# Altium PCB AC_Dimmer_Module.pcbdoc
Units mm, origin at the board's own origin, x right, y up, seen from the top; angles counter-clockwise.
Board outline 94.09 x 74.35 mm, 2 copper layers (Top Layer, Bottom Layer); 13 components, 17 nets, 41 pads, 0 vias.
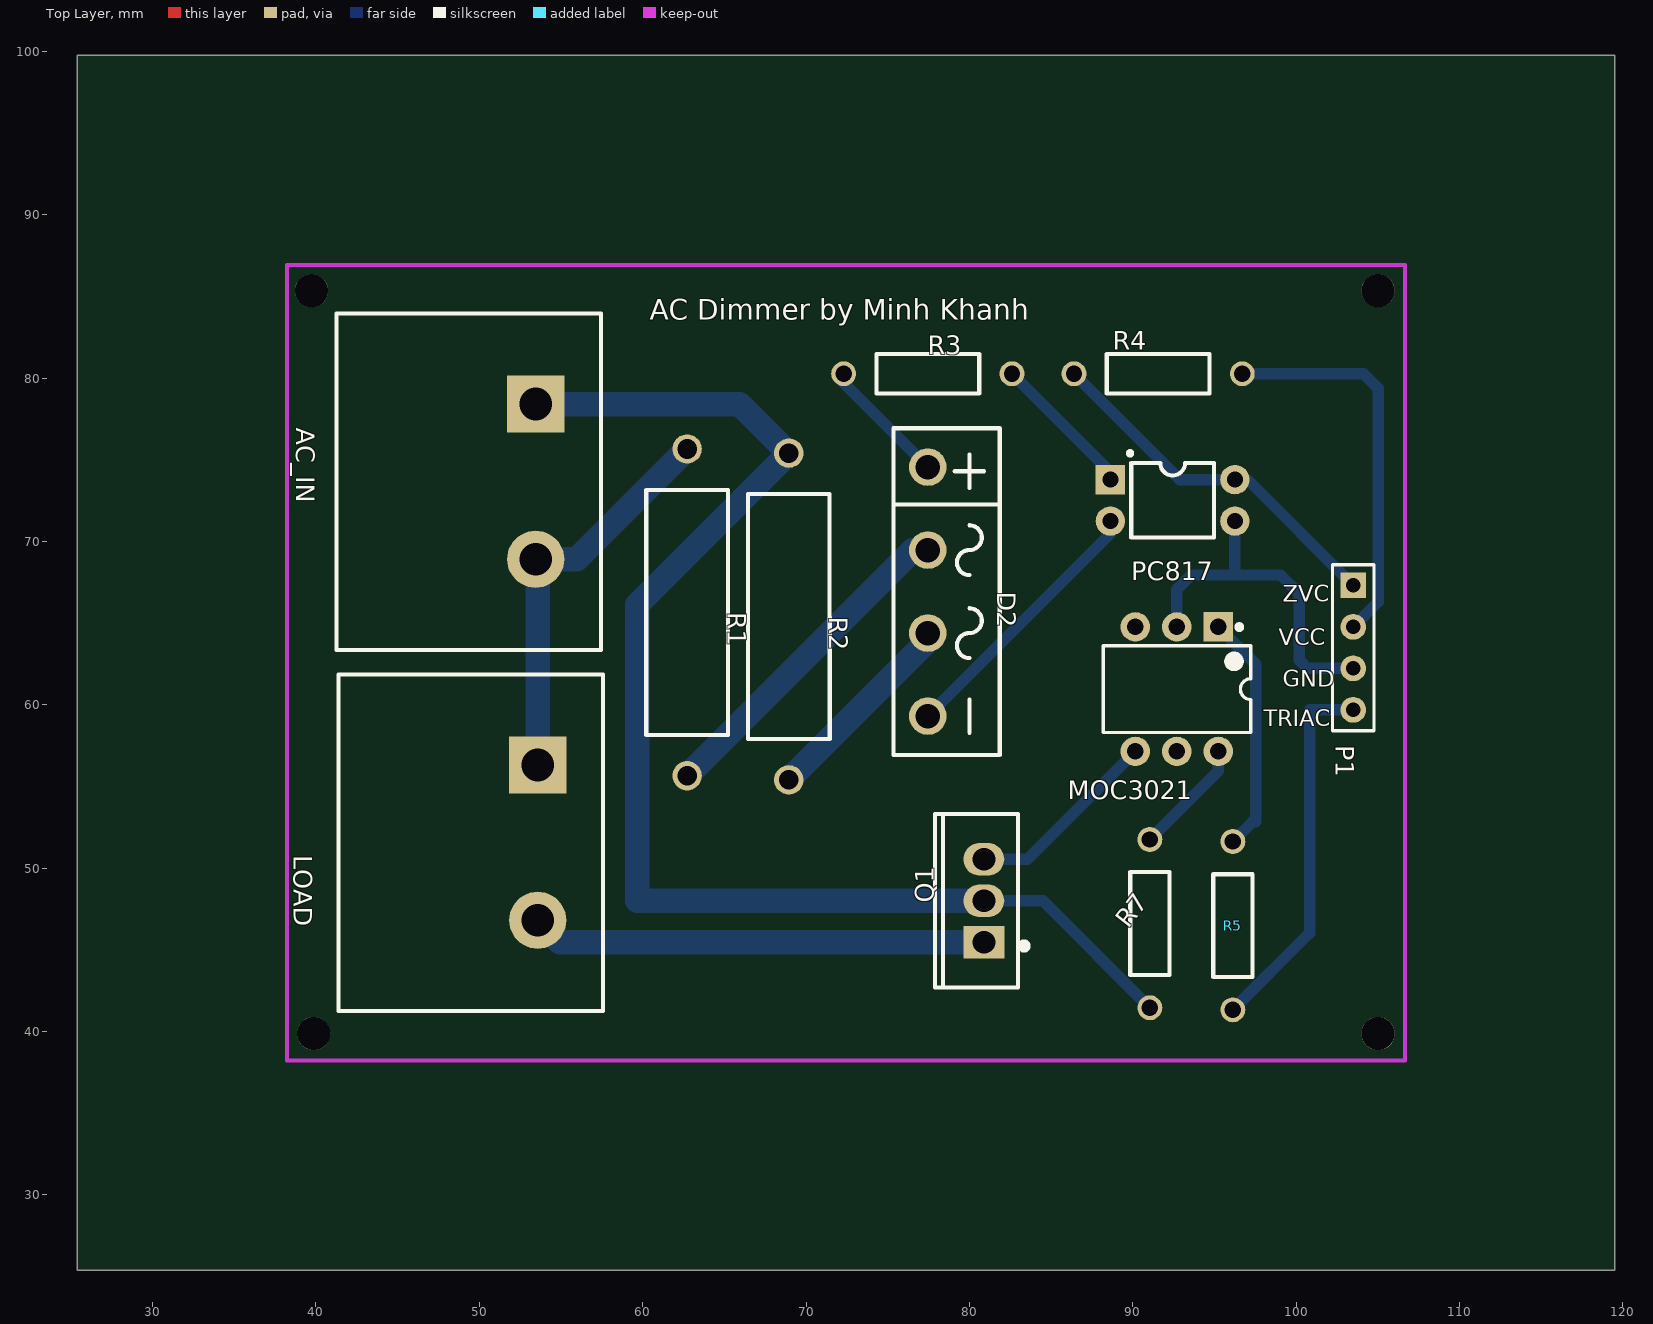
[diagram p0: Top Layer view]
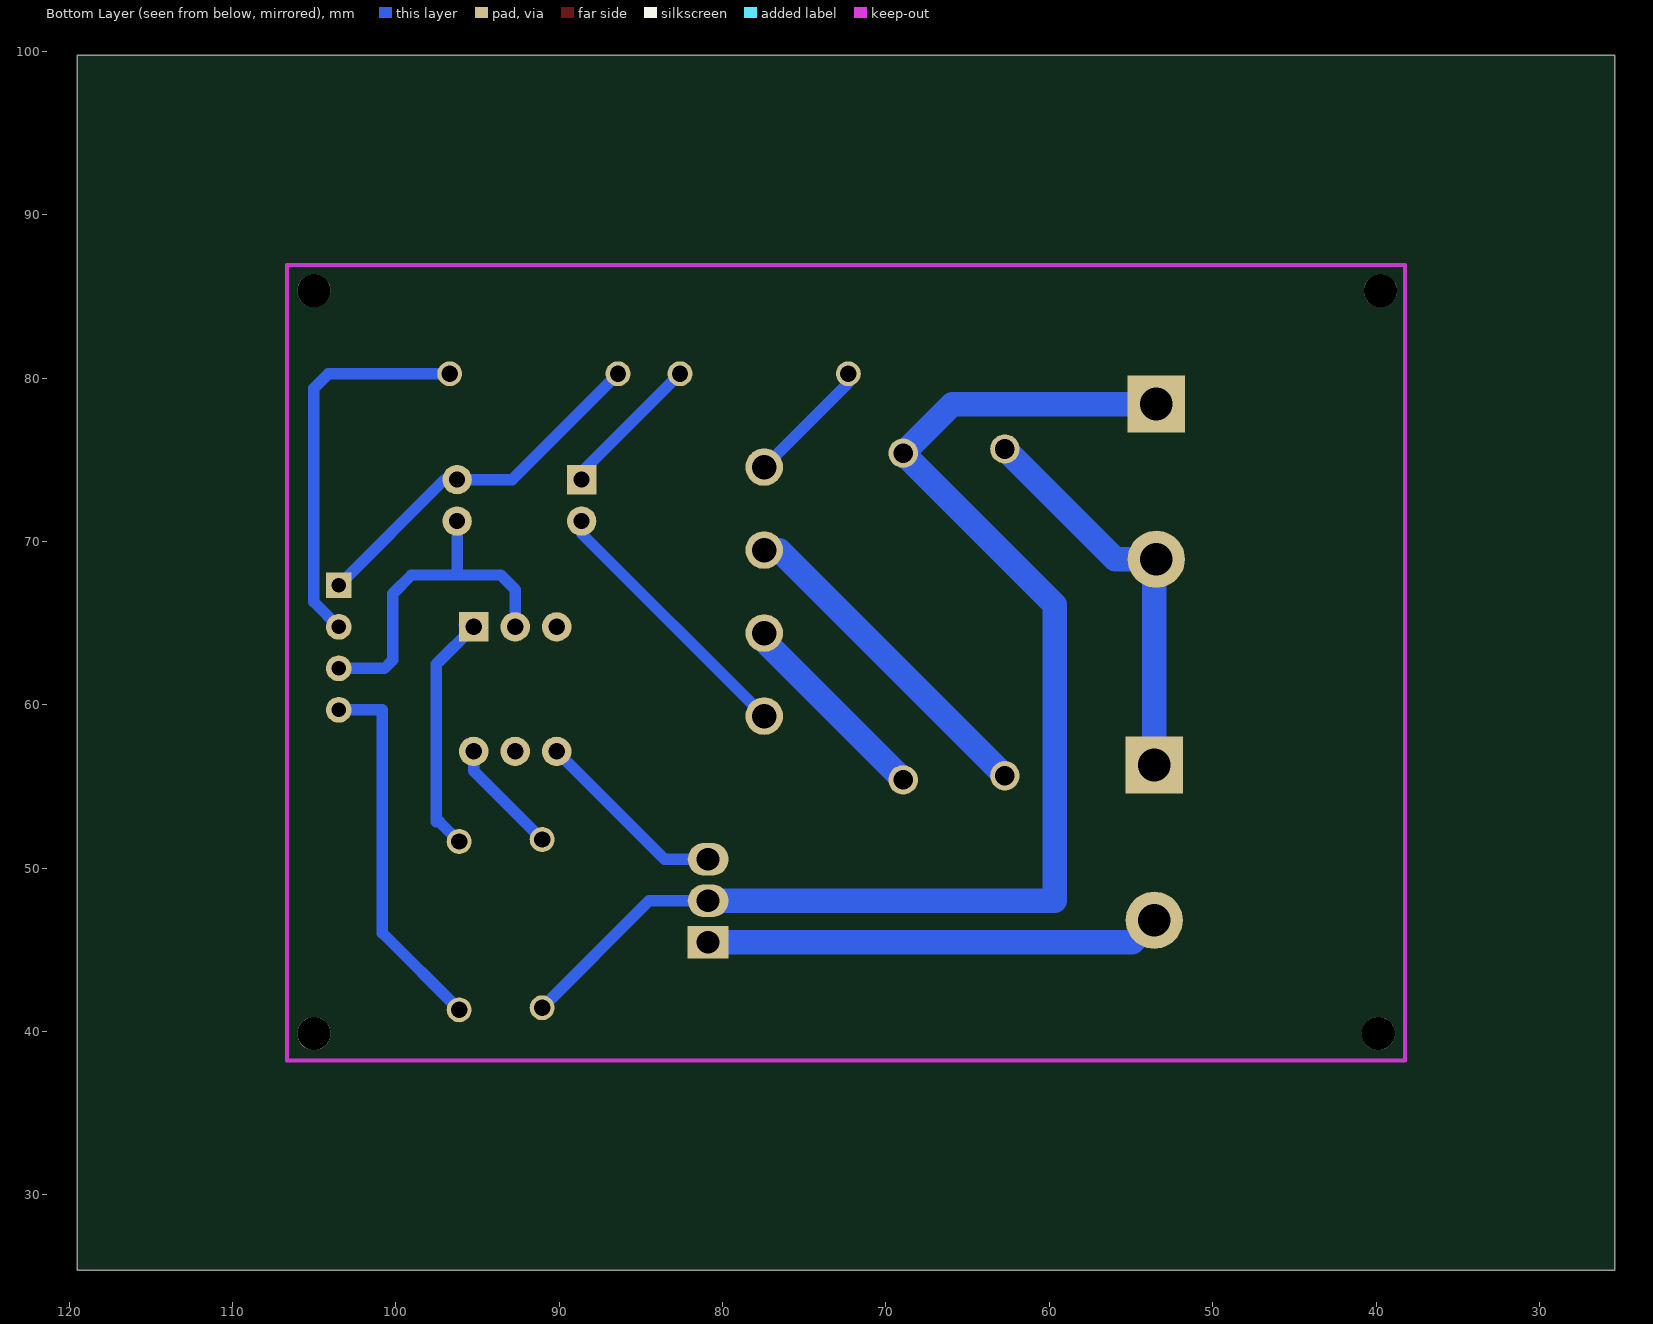
[diagram p1: Bottom Layer view, seen from below]

## Layer stack, top to bottom
Top Layer: signal copper (thickness not stored)
Dielectric: dielectric 0.32, FR-4, Dk 4.8
Bottom Layer: signal copper (thickness not stored)

## Board outline
119.492,25.4 25.4,25.4 25.4,99.751 119.492,99.751

## Components (designator, comment, footprint, x,y, rotation, side; value= is the part's Value field where it differs from the comment)
AC_IN "HB9500-2P" CONN-TH_HB9500SS-9.5-2P 53.452,73.66 r270 top
D2 "KBL410" DIO-BG-TH_RS-4L 77.455,66.929 r270 top
LOAD "HB9500-2P" CONN-TH_HB9500SS-9.5-2P 53.579,51.562 r270 top
MOC3021 "MOC3021" DIP-6_L8.5-W6.4-P2.54-LS7.6-BL 92.695,60.96 r180 top
P1 "Header-Female-2.54_1x4" HDR-4X1/2.54 103.49,63.5 r270 top
PC817 "PC817" DIP-4_L6.4-W4.6-P2.54-LS7.6-BL 92.441,72.517 r270 top
Q1 "BTA20" TO-220F-3_L10.2-W4.9-P2.54-L 80.884,48.006 r90 top
R1 "47K" RES-TH_BD4.5-L11.0-P15.00-D0.8 62.723,65.659 r270 top
R2 "47K" RES-TH_BD4.5-L11.0-P15.00-D0.8 68.946,65.405 r270 top
R3 "1K" RES-TH_BD2.4-L6.3-P10.30-D0.6 77.455,80.264 r0 top
R4 "10K" RES-TH_BD2.4-L6.3-P10.30-D0.6 91.552,80.264 r180 top
R5 "330" RES-TH_BD2.4-L6.3-P10.30-D0.6 96.124,46.482 r270 top
R7 "330" RES-TH_BD2.4-L6.3-P10.30-D0.6 91.044,46.609 r90 top

## Footprints (in the part's own frame and the unit in brackets; to place one, negate y for a bottom-side part, rotate by r counter-clockwise, add the part's x,y. Pads: shape width x height; smd on the part's side, far side on the other; paste and mask are expansions set on the pad)
CONN-TH_HB9500SS-9.5-2P [mm]
  rect 3.5x3.5 hole 2: 1(-4.75,0)
  round 3.5 hole 2: 2(4.75,0)
  silkscreen extent -10.3,-12.2 10.3,4
DIO-BG-TH_RS-4L [mm]
  round 2.3 hole 1.5: 1(-7.62,0) 2(-2.54,0) 3(2.54,0) 4(7.62,0)
  silkscreen extent -10,-2.1 10,4.4
DIP-4_L6.4-W4.6-P2.54-LS7.6-BL [mm]
  rect 1.8x1.8 hole 1: 1(-1.27,-3.81)
  round 1.8 hole 1: 2(1.27,-3.81) 3(1.27,3.81) 4(-1.27,3.81)
  silkscreen extent -3,-2.73 2.29,2.54
DIP-6_L8.5-W6.4-P2.54-LS7.6-BL [mm]
  rect 1.8x1.8 hole 1: 1(-2.54,-3.81)
  round 1.8 hole 1: 2(0,-3.81) 3(2.54,-3.81) 4(2.54,3.81) 5(0,3.81) 6(-2.54,3.81)
  silkscreen extent -4.52,-3.95 4.5,2.65
HDR-4X1/2.54 [mil]
  rect 62x62 hole 35: 1(-150,0)
  round 62 hole 35: 2(-50,0) 3(50,0) 4(150,0)
  silkscreen extent -200,-50 200,50
RES-TH_BD2.4-L6.3-P10.30-D0.6 [mm]
  round 1.524 hole 1: 1(-5.15,0) 2(5.15,0)
  silkscreen extent -3.15,-1.2 3.15,1.2
RES-TH_BD4.5-L11.0-P15.00-D0.8 [mm]
  round 1.8 hole 1.2: 1(-10,0) 2(10,0)
  silkscreen extent -7.5,-2.5 7.5,2.5
TO-220F-3_L10.2-W4.9-P2.54-L [mm]
  rect 2x2.5 hole 1.4: 1(-2.54,0)
  oval 2x2.5 hole 1.4: 2(0,0) 3(2.54,0)
  silkscreen extent -5.3,-2.66 5.3,3

## Free pads (board coordinates)
  round 2.032 hole 2.032 unplated: ""(39.736,85.344) ""(39.863,39.878) ""(105.014,39.878) ""(105.014,85.344)

## Nets (pads, with @x,y where several pads share a name; then routed paths per layer and width w, separated by ;. In a path a pad name is that pad's centre, name@x,y a point inside that pad or via, vN(x,y) a via of type N, cw(c..) or ccw(c..) an arc to the next point about the centre after c; other vN are vias at no path point)
AC_IN_1: AC_IN.1 Q1.2 R2.1 R7.1 | length 82.1
  Bottom Layer w0.7: Q1.2 84.497,48.006 R7.1
  Bottom Layer w1.5: AC_IN.1 65.941,78.41 R2.1 59.675,66.134 59.675,48.006 Q1.2
AC_IN_2: AC_IN.2 LOAD.1 R1.1 | length 24.7
  Bottom Layer w1.5: LOAD.1 53.579,68.783 AC_IN.2 55.974,68.91 R1.1
D2_1: D2.1 R3.1 | length 7.8
  Bottom Layer w0.7: R3.1 72.305,79.699 D2.1
LOAD_2: LOAD.2 Q1.1 | length 27.9
  Bottom Layer w1.5: LOAD.2 54.925,45.466 Q1.1
MOC3021_1: MOC3021.1 R5.1 | length 15.5
  Bottom Layer w0.6: MOC3021.1 95.743,64.77 MOC3021.1@95.87,64.897
  Bottom Layer w0.7: MOC3021.1 97.521,62.484 97.521,52.832 97.324,52.832 R5.1
MOC3021_3: MOC3021.3
MOC3021_4: MOC3021.4 Q1.3 | length 12
  Bottom Layer w0.7: Q1.3 83.551,50.546 MOC3021.4
MOC3021_5: MOC3021.5
MOC3021_6: MOC3021.6 R7.2 | length 7.1
  Bottom Layer w0.7: R7.2 95.235,55.95 MOC3021.6
P1_2: P1.2 R4.1 | length 23.9
  Bottom Layer w0.7: R4.1 104.125,80.264 105.014,79.375 105.014,66.294 P1.2
P1_4: P1.4 R5.2 | length 23
  Bottom Layer w0.7: R5.2 100.823,46.031 100.823,59.69 P1.4
PC817_1: PC817.1 R3.2 | length 9
  Bottom Layer w0.7: R3.2 88.631,74.238 PC817.1
PC817_2: D2.4 PC817.2 | length 16.6
  Bottom Layer w0.7: D2.4 88.631,70.485 PC817.2
PC817_3: MOC3021.2 P1.3 PC817.3 | length 24.8
  Bottom Layer w0.7: MOC3021.2 92.695,67.056 93.584,67.945 96.251,67.945 ; P1.3 100.696,62.23 100.188,62.738 100.188,66.802 99.045,67.945 96.251,67.945 ; 96.251,67.945 PC817.3 96.251,67.945
PC817_4: P1.1 PC817.4 R4.2 | length 22.5
  Bottom Layer w0.7: R4.2 92.879,73.787 PC817.4 97.013,73.787 P1.1
R1_2: D2.2 R1.2 | length 20.5
  Bottom Layer w1.5: R1.2 76.533,69.469 D2.2
R2_2: D2.3 R2.2 | length 12.5
  Bottom Layer w1.5: R2.2 77.455,63.914 D2.3

## Silkscreen, mask and mechanical layers (free items; w line width, h text height)
Top Overlay:
  text "AC Dimmer by Minh Khanh" at 60.437,83.576 h1.25
  text "ZVC" at 99.172,66.302 h1
  text "VCC" at 98.918,63.635 h1
  text "GND" at 99.172,61.095 h1
  text "TRIAC" at 98.029,58.682 h1